# Altium PCB precharge.PcbDoc
Units mil, origin at the board's own origin, x right, y up, seen from the top; angles counter-clockwise.
Board outline 7045 x 3615 mil, 4 copper layers (Top Layer, Internal Plane 1, Internal Plane 2, Bottom Layer); 58 components, 34 nets, 159 pads, 5 vias.
Unrouted connection lines stored in the file: 12.
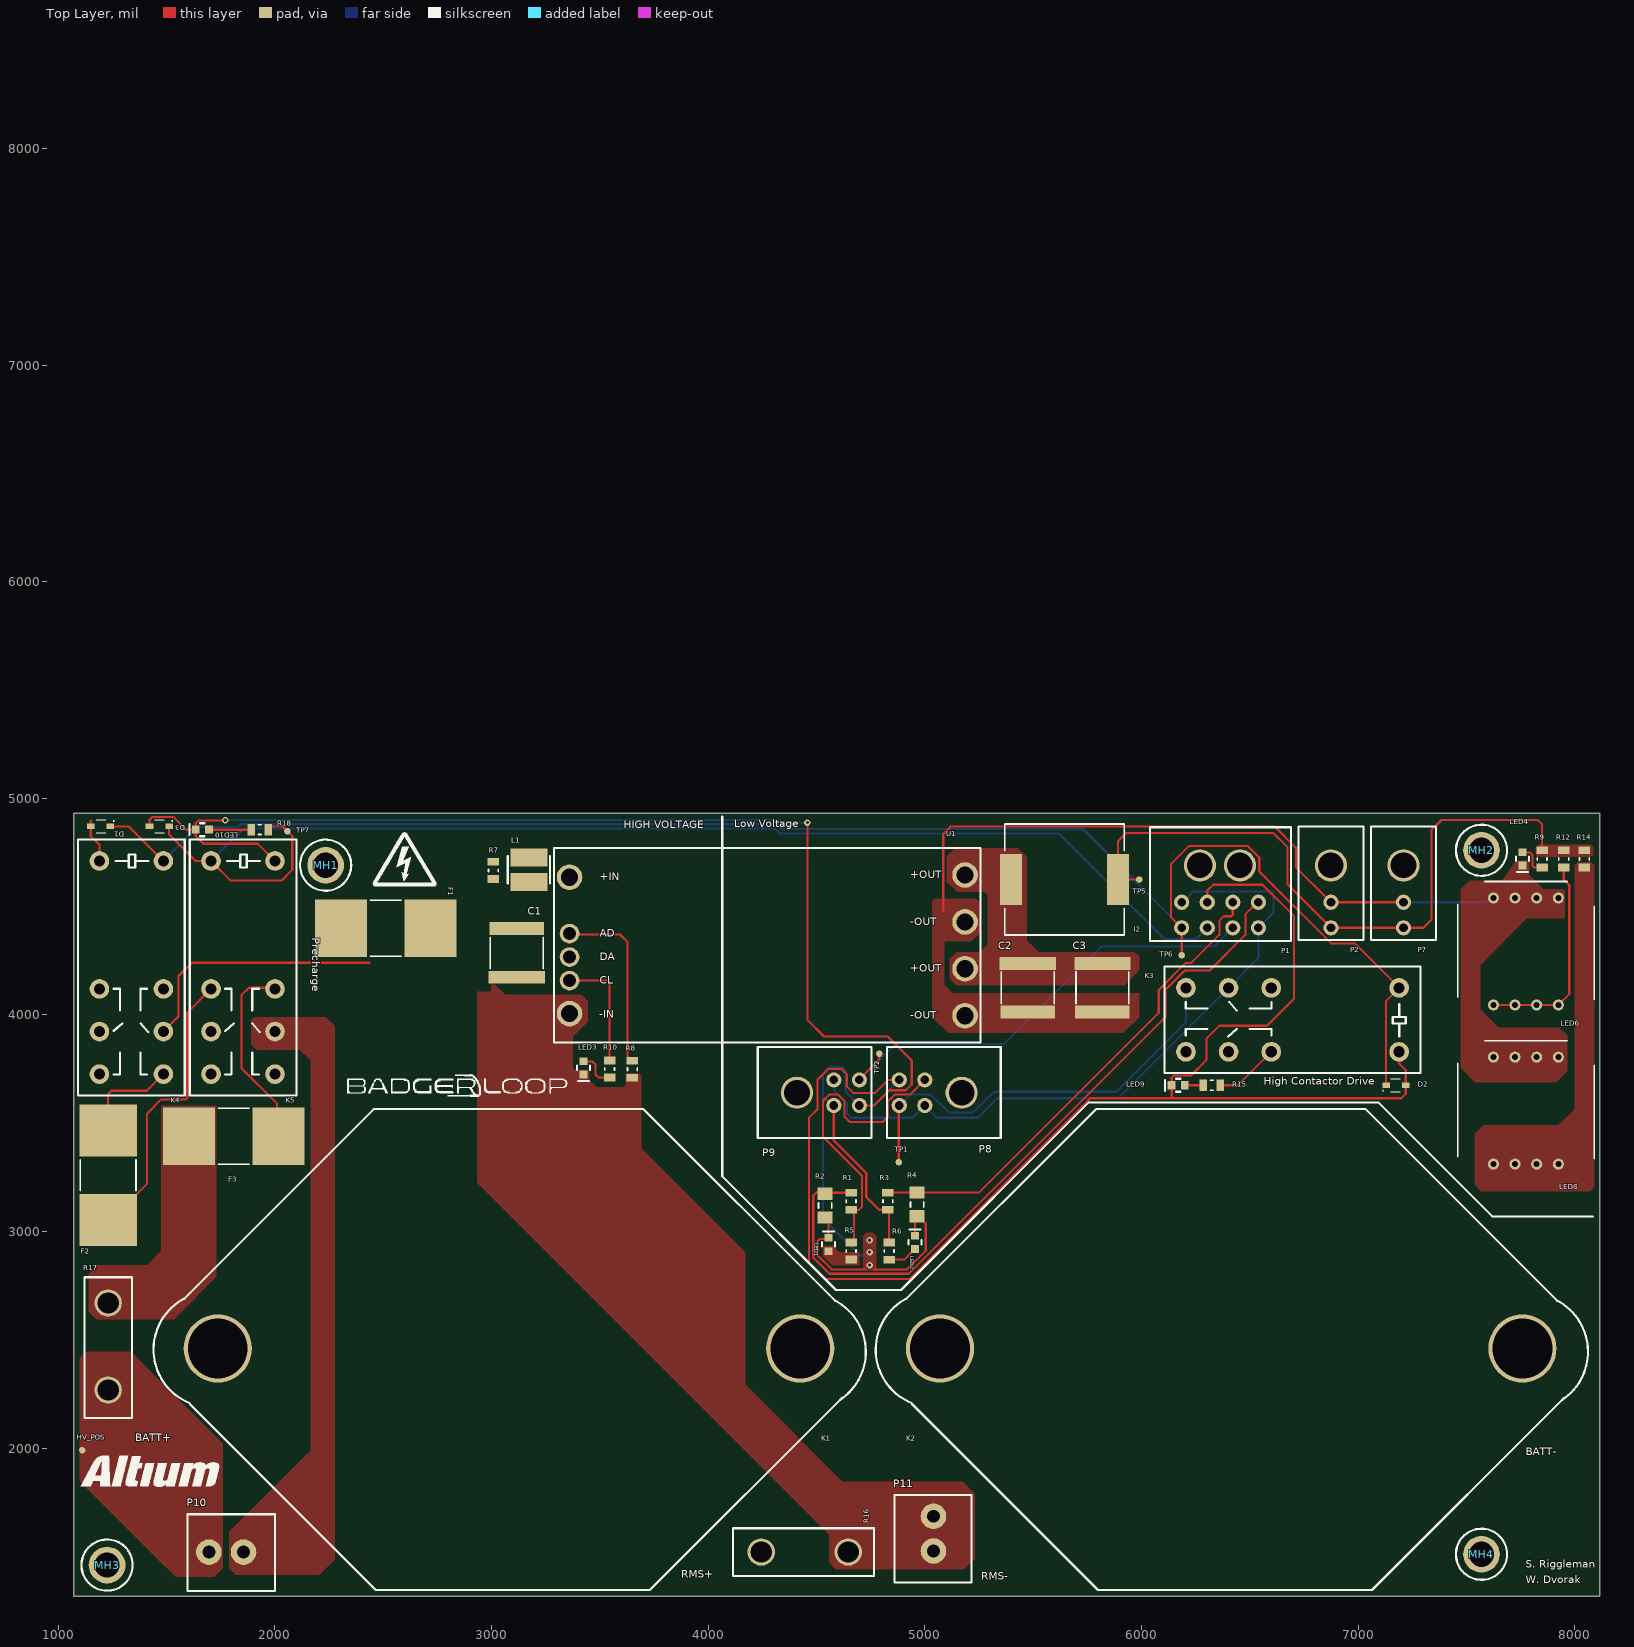
[diagram p0: Top Layer view]
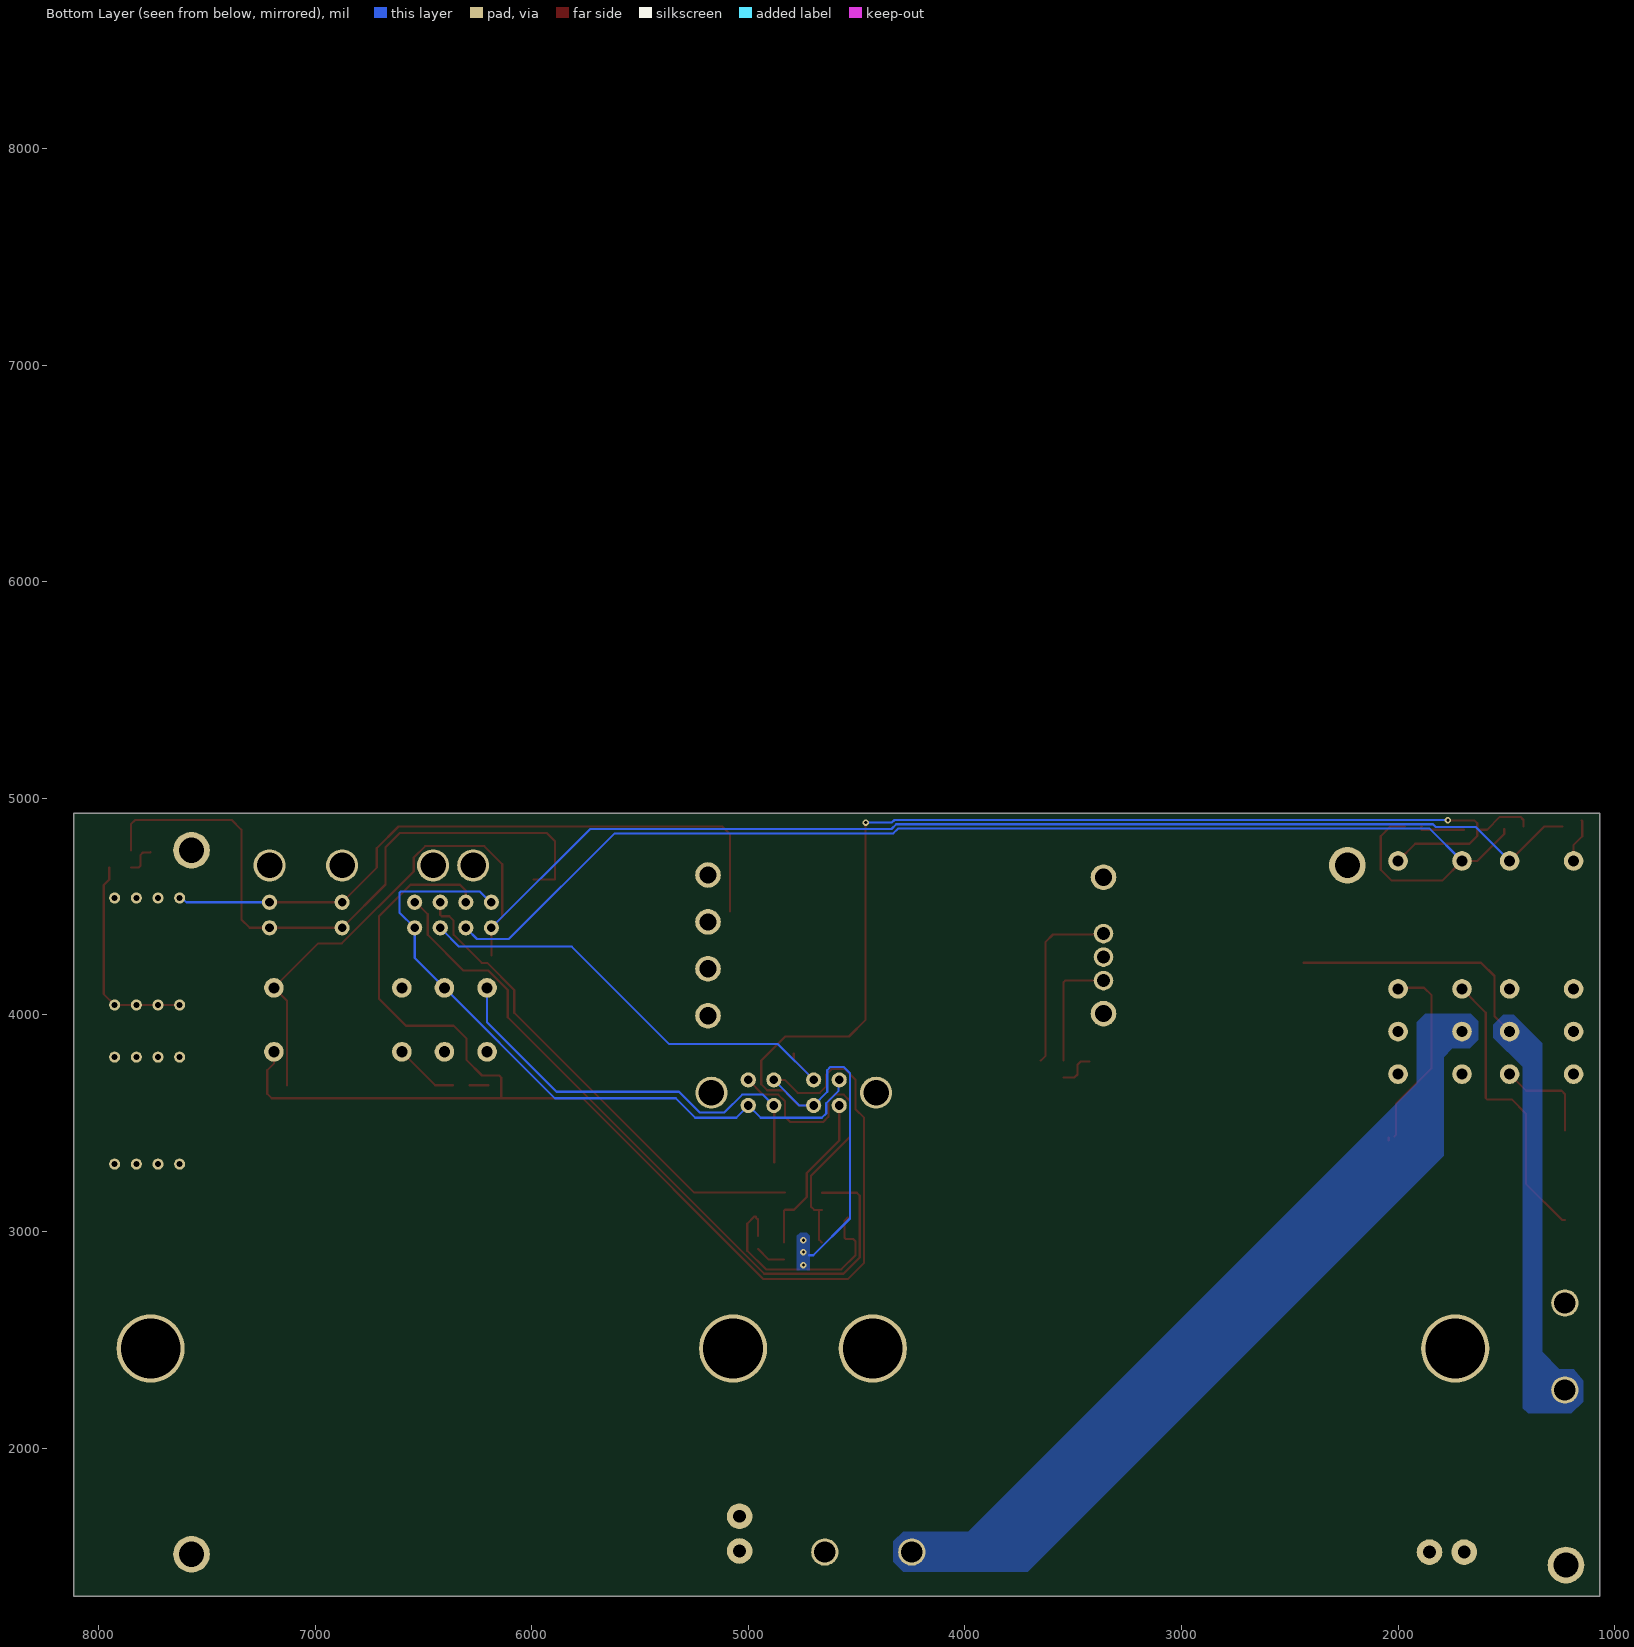
[diagram p1: Bottom Layer view, seen from below]
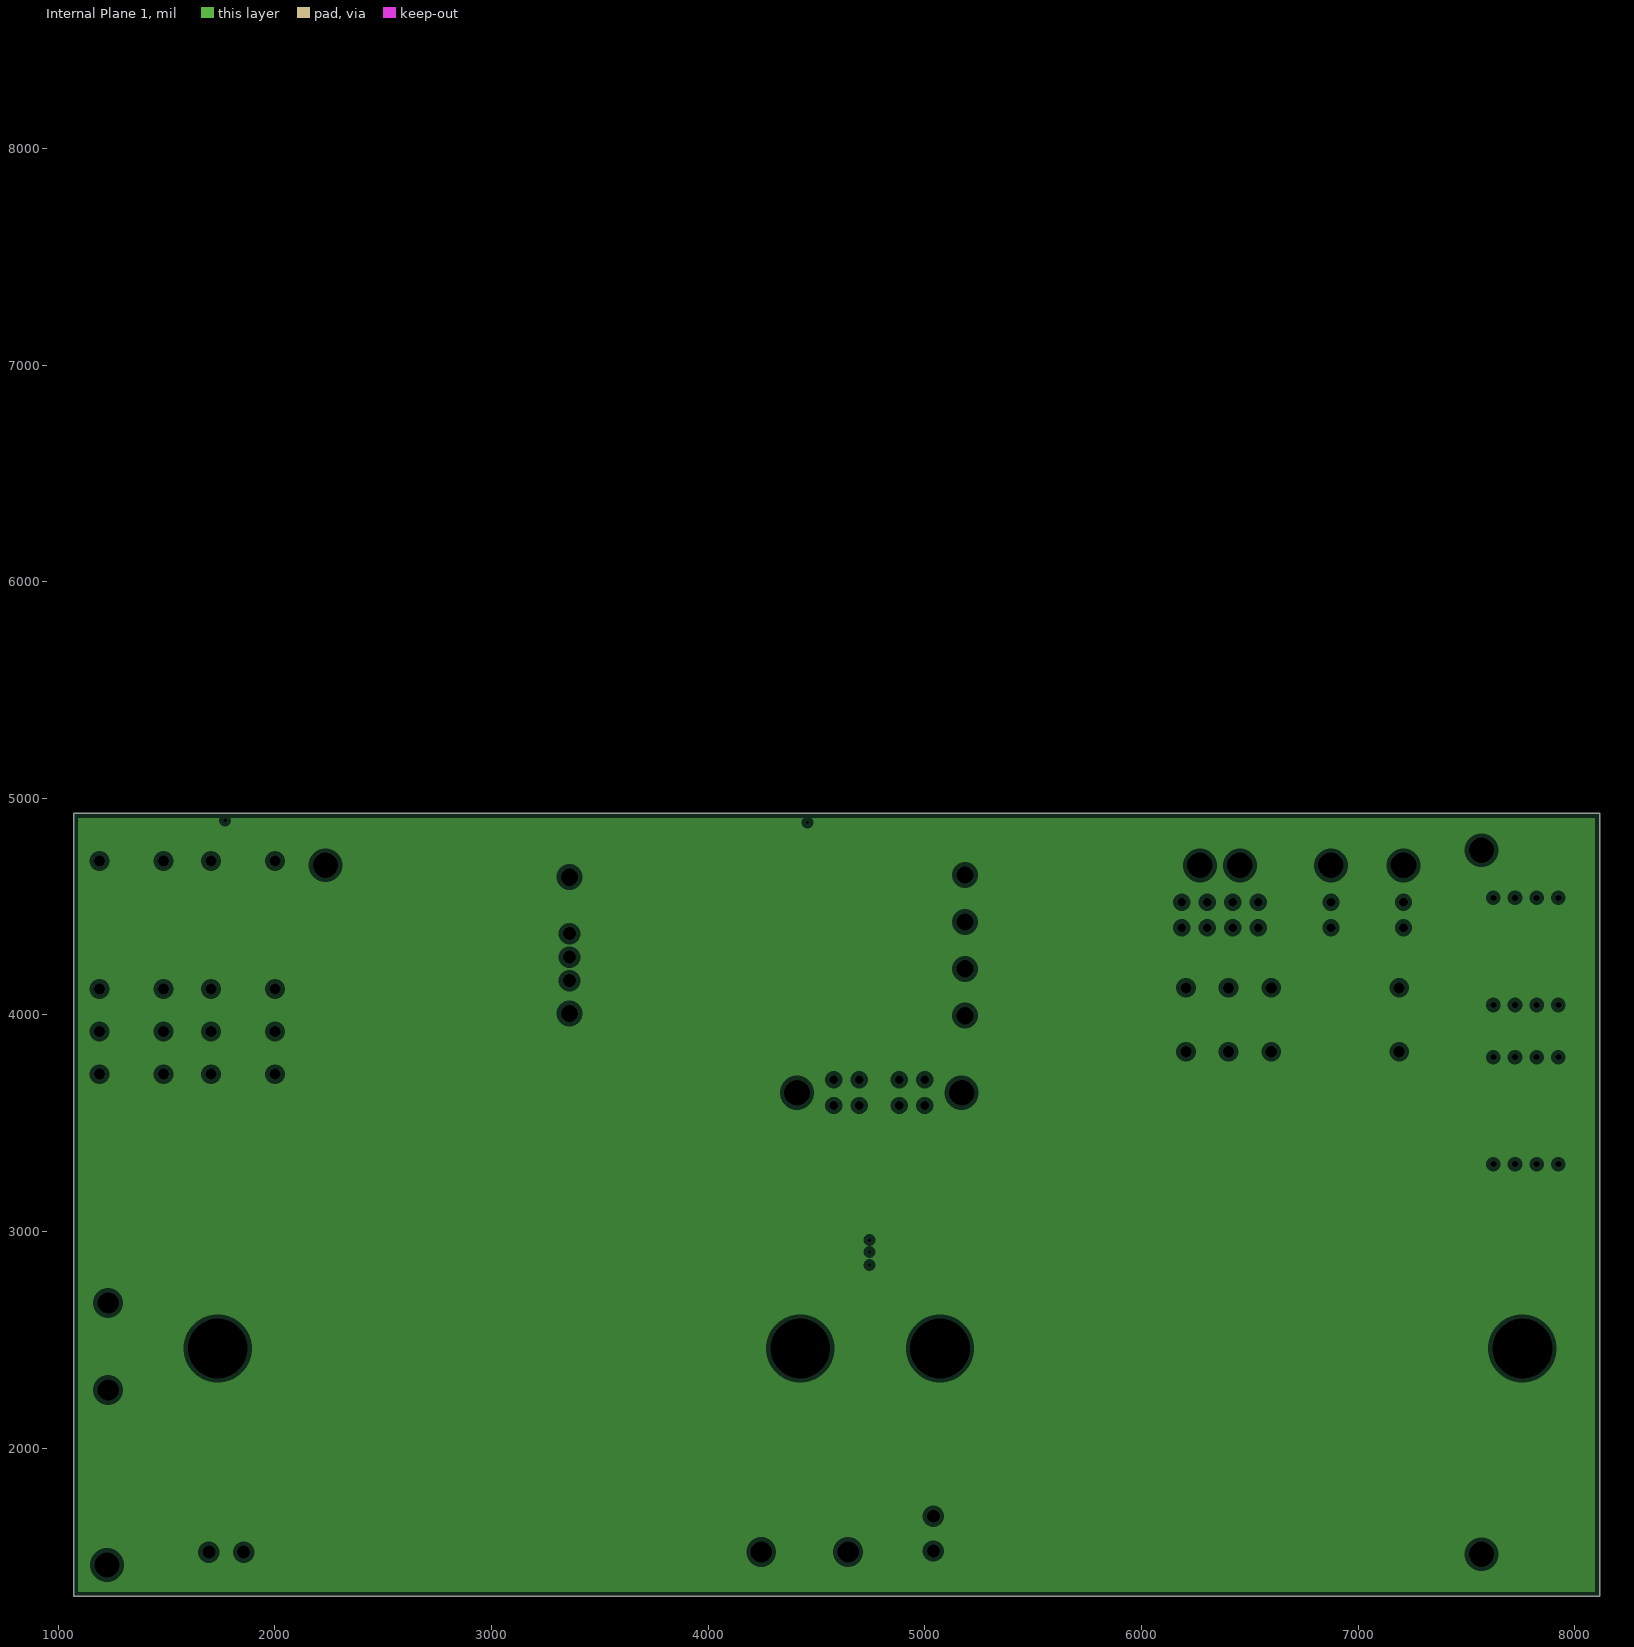
[diagram p2: Internal Plane 1, clearances drawn from the general rule]
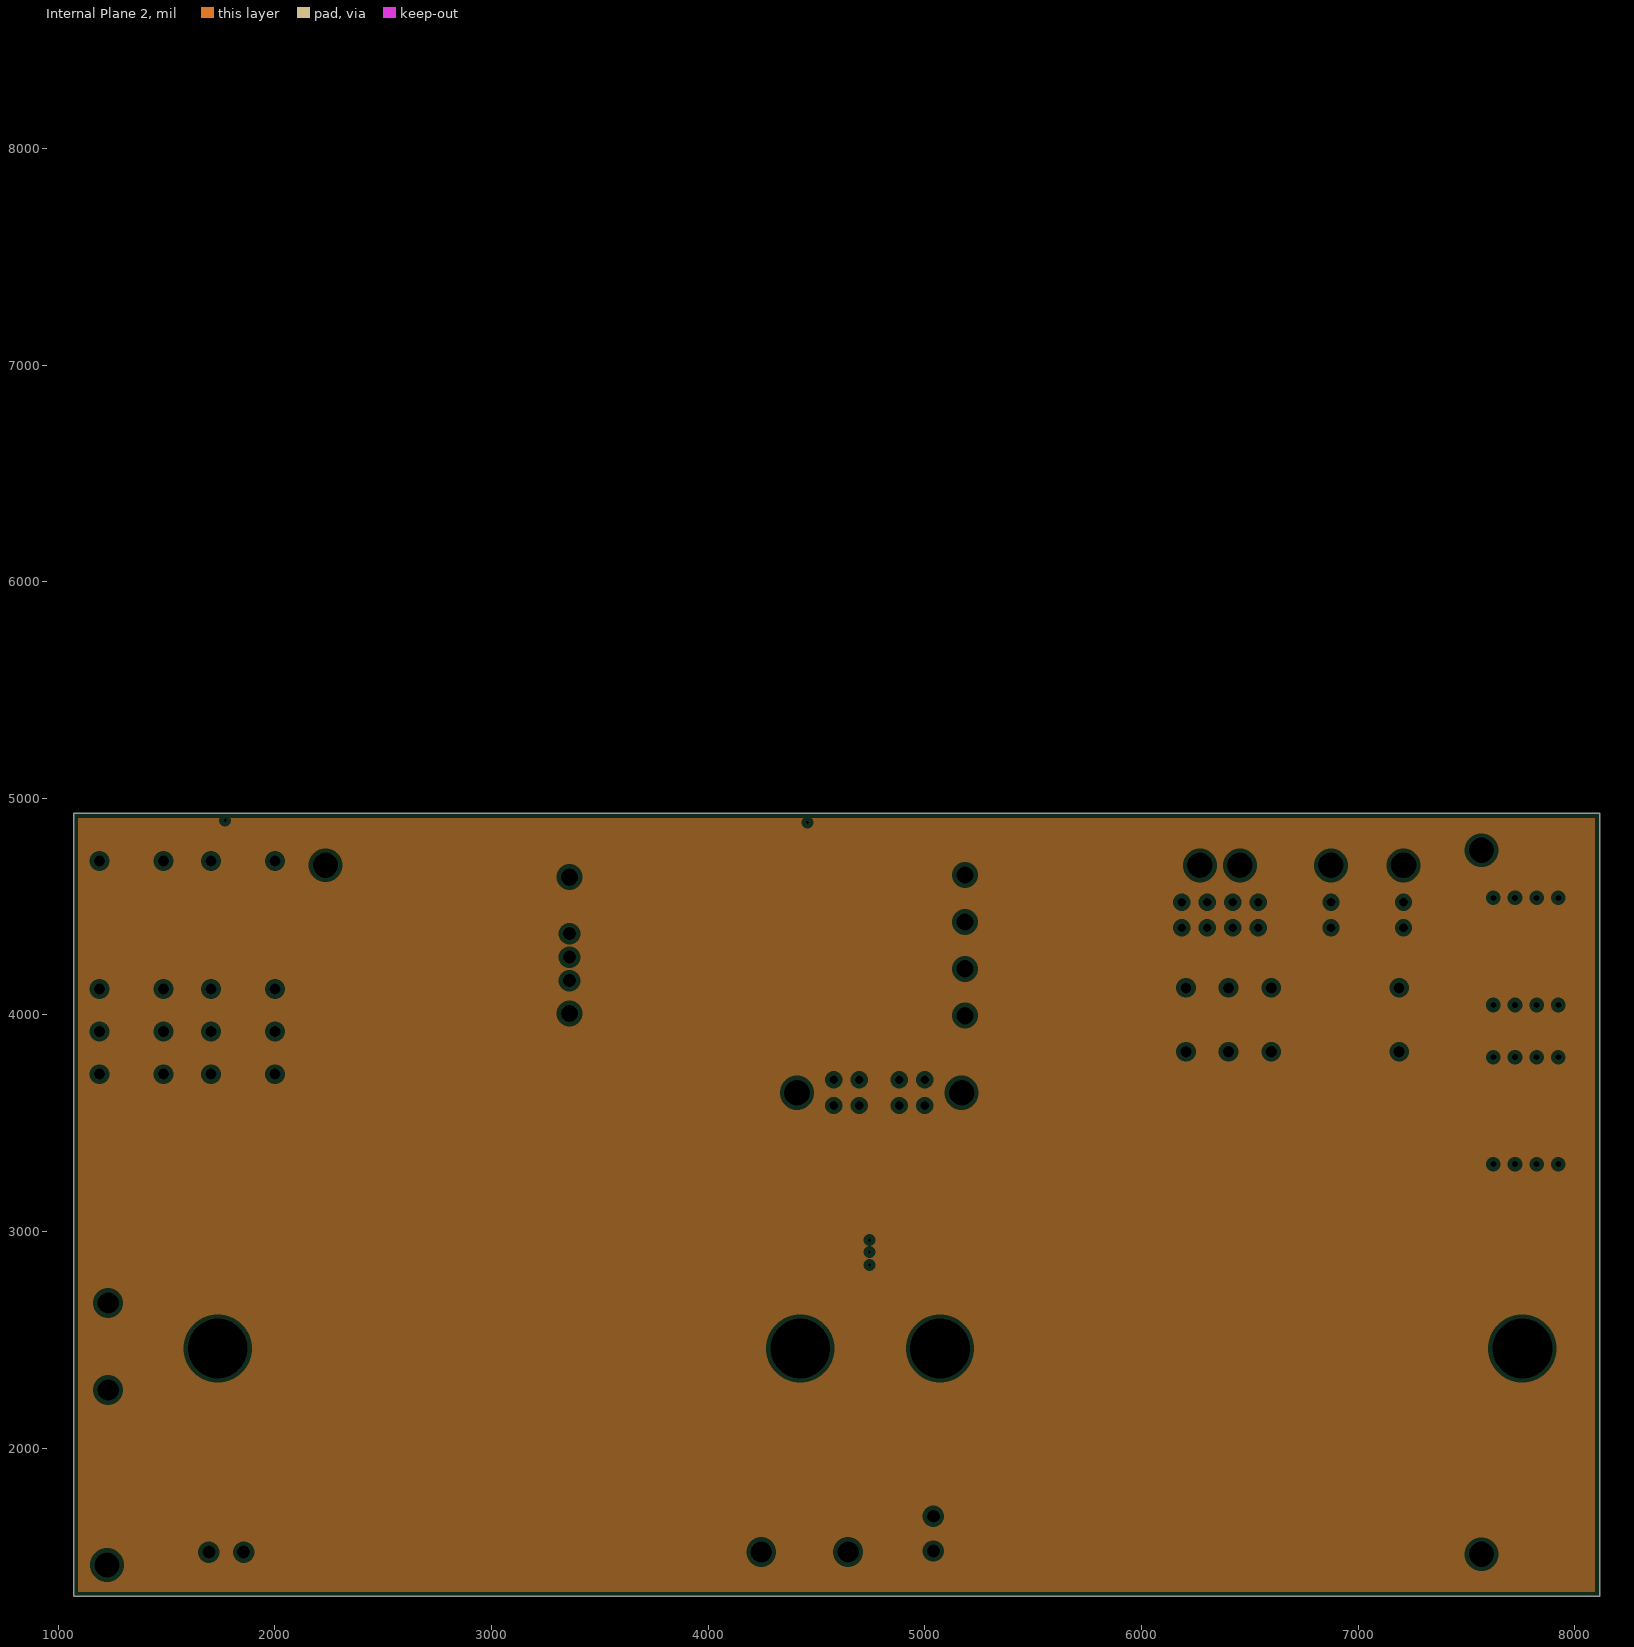
[diagram p3: Internal Plane 2, clearances drawn from the general rule]
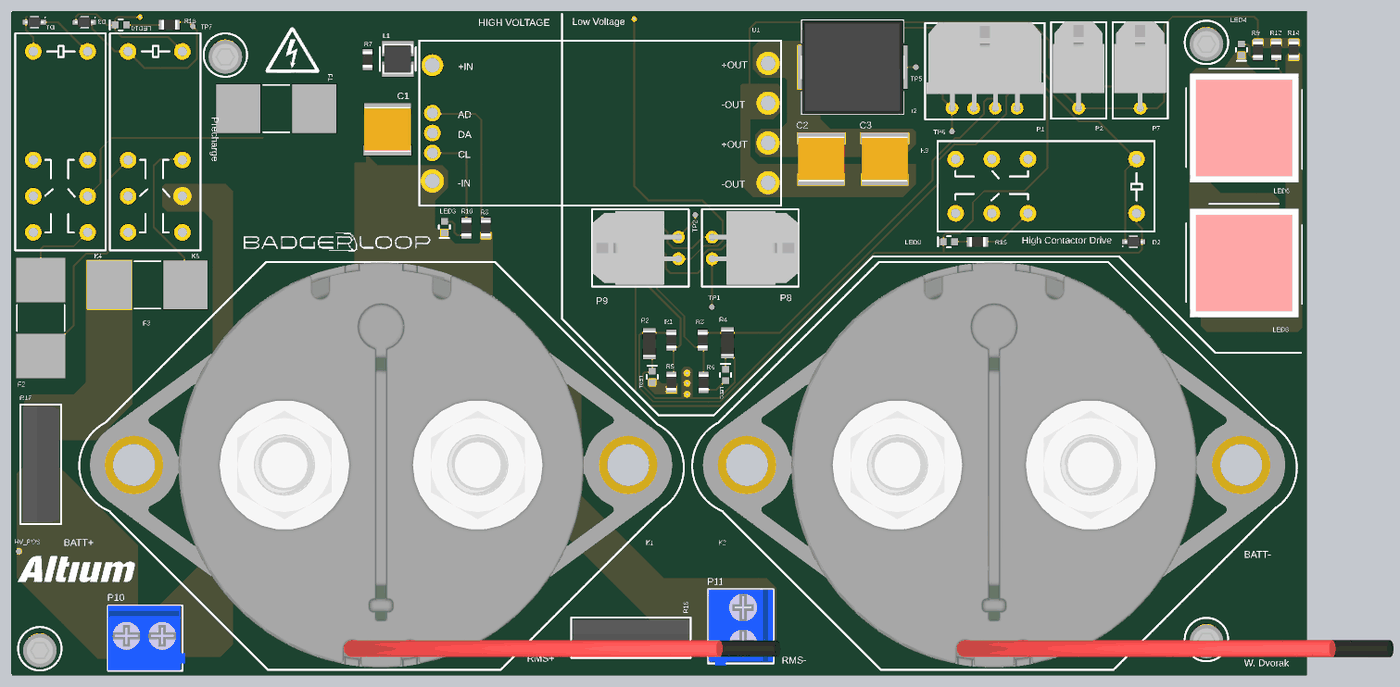
[diagram p4: 3D render of the assembled board from above, using the file's embedded part models]

## Layer stack, top to bottom
Top Solder: solder mask 0.4, Solder Resist, Dk 3.5
Top Layer: signal copper 1.4
Dielectric 1: dielectric 12.6, FR-4, Dk 4.8
Internal Plane 1: plane copper 1.4
Dielectric2: dielectric 12.6, FR-4, Dk 4.8
Internal Plane 2: plane copper 1.4
Dielectric3: dielectric 12.6, FR-4, Dk 4.8
Bottom Layer: signal copper 1.4
Bottom Solder: solder mask 0.4, Solder Resist, Dk 3.5

## Board outline
1070,1315 1070,4930 8115,4930 8115,1315

## Design rules (kind name [scope] priority, off if disabled: settings)
Clearance HV_GND [InNetClass('High Voltage +') vs InNetClass('Ground')] p1: gap=160 ignorepadtopadclearanceinfootprint=TRUE except(0: Arc-Hole Track-Hole SMDPad-Hole THPad-Hole Via-Hole Fill-Hole Poly-Hole Region-Hole Text-Hole; 10: Arc-Text Track-Text SMDPad-Text THPad-Text Via-Text Fill-Text Poly-Text Region-Text Text-Text)
Clearance HV_LV [InNetClass('High Voltage') vs InNetClass('Low Voltage')] p2: gap=160 ignorepadtopadclearanceinfootprint=TRUE except(0: Arc-Hole Track-Hole SMDPad-Hole THPad-Hole Via-Hole Fill-Hole Poly-Hole Region-Hole Text-Hole; 10: Arc-Text Track-Text SMDPad-Text THPad-Text Via-Text Fill-Text Poly-Text Region-Text Text-Text)
Clearance [All] p3: gap=10 ignorepadtopadclearanceinfootprint=TRUE except(0: Arc-Hole Track-Hole SMDPad-Hole THPad-Hole Via-Hole Fill-Hole Poly-Hole Region-Hole Text-Hole)
Clearance Clearance_1 [All] p4: gap=10 ignorepadtopadclearanceinfootprint=TRUE except(0: Arc-Hole Track-Hole SMDPad-Hole THPad-Hole Via-Hole Fill-Hole Poly-Hole Region-Hole Text-Hole)
Height [All] p1: minheight=0 maxheight=20000 prefheight=500
HoleSize [All] p1: absolutevalues=TRUE maxlimit=300 minlimit=1 maxpercent=80.000 minpercent=20.000
PlaneClearance [All] p1: clearance=20
PlaneConnect [All] p1: planeconnectstyle=Relief reliefexpansion=20 reliefentries=4 reliefconductorwidth=10 reliefairgap=10
PolygonConnect [All] p1: connectstyle=Direct reliefconductorwidth=10 reliefentries=4 polygonreliefangle="90 Angle" airgapwidth=10
RoutingVias [All] p1: holewidth=15 width=30 viastyle="Through Hole" minholewidth=5 minwidth=12 maxholewidth=500 maxwidth=750
SilkToSilkClearance [All] p1: silktosilkclearance=1
SilkToSolderMaskClearance [IsPad] p1: minsilkscreentomaskgap=1 clearancetoexposedcopper=TRUE
SolderMaskExpansion [All] p1: expansion=4
Width [All] p1: maxlimit=10 minlimit=10 preferedwidth=10
24 further rules are at their usual default settings.

## Classes and differential pairs
net class Ground: Avionics_RET HV_GND HV_IND_GND
net class "High Voltage +": HV_BATT_POS_IN HV_BATT_POS_OUT NetC1_2 NetF1_2 NetF2_1 NetF2_2 NetF3_1 NetF3_2 NetK5_3
polygon class HV_POS_IN: "Top Layer-No Net" "Top Layer-No Net 3"
net class "Low Voltage": Avionics_RET High_Contactor_Aux High_Contactor_DR HV_IND_GND HV_IND_POS Low_Contactor_Aux Low_Contactor_DR NetC2_1 NetK3_7 NetLED1_1 NetLED2_1 NetLED4_1 NetLED6_1 NetLED8_1 NetLED9_1 NetLED10_1 NetP8_1 NetP9_1 RMS_7_Relay2 RMS_21_Relay1 VPOS-24V
net class "High Voltage": HV_BATT_POS_IN HV_BATT_POS_OUT HV_GND NetC1_2 NetF1_2 NetF2_1 NetF2_2 NetF3_1 NetF3_2 NetK5_3 NetLED3_1 NetR8_2 NetR10_2
component class precharge_relays: D1 D2 D3 F2 F3 K3 K4 K5 LED9 LED10 R15 R16 R17 R18 TP6 TP7
component class indicator_light: C1 C2 C3 F1 HV_POS I2 L1 LED3 LED4 LED6 LED8 R7 R8 R9 R10 R12 R14 TP4 TP5 U1
component class Contactors: H1 H2 H3 H4 K1 K2 LED1 LED2 P8 P9 P10 P11 R1 R2 R3 R4 R5 R6 TP1 TP2
component class connectors: MH1 MH2 MH3 MH4 P1 P2 P7

## Components (designator, comment, footprint, x,y, rotation, side; value= is the part's Value field where it differs from the comment)
C1 "CGA9P4X7T2W105K250KE_1" CAPC5860X28N 3116,4286 r90 top
C2 "CGA9P4X7T2W105K250KE_1" CAPC5860X28N 5475,4125 r270 top
C3 "CGA9P4X7T2W105K250KE_1" CAPC5860X28N 5820,4125 r270 top
D1 "Diode General Purpose_2" SODFL250X110-2N 1195,4870 r0 top
D2 "Diode General Purpose_2" SODFL250X110-2N 7175,3675 r180 top
D3 "Diode General Purpose_2" SODFL250X110-2N 1466,4870 r0 top
F1 "F6257CT-ND" "FUSE BOARD MNT 500MA 350VAC/VDC" 2511,4400 r0 top
F2 "F6257CT-ND" "FUSE BOARD MNT 500MA 350VAC/VDC" 1230,3260 r90 top
F3 "F6257CT-ND" "FUSE BOARD MNT 500MA 350VAC/VDC" 1810,3440 r180 top
HV_POS "TP" "Test Point" 1110,1990 r90 top
I2 "744309033" INDM140130X90N 5645,4625 r0 top
K1 "Gigavac 200" "Gigavac 200" 1736.02,2460 r0 top
K2 "*" "Gigavac 200" 5070,2460 r0 top
K3 "G2RL-24_DC12" G2RL 7190,4125 r0 top
K4 "G2RL-24_DC12" G2RL 1189.72,4710.55 r90 top
K5 "G2RL-24_DC12" G2RL 1705,4710.55 r90 top
L1 "SRR3818A-1R0Y" INDM3838X18N 3172,4670 r270 top (schematic designator I1)
LED1 "LED GREEN 0603" "LED 0603 GREEN" 4555,2940 r90 top
LED2 "LED GREEN 0603" "LED 0603 GREEN" 4955,2950 r90 top
LED3 "LED RED 0603" "LED 0603 RED" 3425,3755 r270 top
LED4 "LED GREEN 0603" "LED 0603 GREEN" 7760,4720 r270 top
LED6 "DE4SRD" DE4SRD 7925,4045.91 r90 top
LED8 "DE4SRD" DE4SRD 7925,3310.91 r90 top
LED9 "LED GREEN 0603" "LED 0603 GREEN" 6169.49,3675 r180 top
LED10 "LED GREEN 0603" "LED 0603 GREEN" 1665,4855 r180 top
MH1 "4-40 Mount Hole" MH 2234,4691 r0 top
MH2 "4-40 Mount Hole" MH 7570,4760 r0 top
MH3 "4-40 Mount Hole" MH 1225,1460 r0 top
MH4 "4-40 Mount Hole" MH 7570,1510 r0 top
P1 "43045-0800" 430450800 6270,4690 r180 top
P2 "43045-0200" 430450200 6875,4690 r180 top
P7 "43045-0200" 430450200 7210,4690 r180 top
P8 "43045-0400" 430450400 5170,3641 r90 top
P9 "43045-0400" 430450400 4410,3641 r270 top
P10 "Screw Terminal 2x1" "2POS TERM BLOCK" 1695,1520 r0 top
P11 "Screw Terminal 2x1" "2POS TERM BLOCK" 5040,1685 r270 top
R1 "10k" SMD-0805-RES 4660,3139.37 r270 top
R2 "2.61k" SMD-1206-RES 4540,3120 r270 top
R3 "10k" SMD-0805-RES 4830,3140 r270 top
R4 "2.61k" SMD-1206-RES 4965,3125 r270 top
R5 "1k" SMD-0805-RES 4660,2910 r270 top
R6 "1k" SMD-0805-RES 4835,2909.49 r270 top
R7 "1" SMD-0805-RES 3008,4667 r270 top
R8 "1k" SMD-0805-RES 3650,3749.37 r90 top
R9 "1k" SMD-0805-RES 7850,4720 r270 top
R10 "1k" SMD-0805-RES 3545,3750 r90 top
R12 "1k" SMD-0805-RES 7950,4720 r270 top
R14 "1k" SMD-0805-RES 8045,4720 r270 top
R15 "1k" SMD-0805-RES 6325,3675 r180 top
R16 "LTO150F10000JTE3" TO-247-2 4245,1520 r0 top
R17 "LTO150F10000JTE3" TO-247-2 1230,2268.43 r90 top
R18 "1k" SMD-0805-RES 1930,4855 r180 top
TP1 "TP" "Test Point" 4880,3320 r90 top
TP2 "TP" "Test Point" 4790,3821 r90 top
TP5 "TP" "Test Point" 5990,4625 r90 top
TP6 "TP" "Test Point" 6186,4275 r90 top
TP7 "TP" "Test Point" 2057.5,4847.5 r90 top
U1 "DCM290P138T600A40" DCM290y138x600A40 4272.99,4320.96 r0 top

## Footprints (in the part's own frame and the unit in brackets; to place one, negate y for a bottom-side part, rotate by r counter-clockwise, add the part's x,y. Pads: shape width x height; smd on the part's side, far side on the other; paste and mask are expansions set on the pad)
"2POS TERM BLOCK" [mm] "5mm Pitch"
  round 3 hole 1.5: 1(0,0) 2(4.064,0)
  silkscreen extent -2.5,-4.57 7.75,4.44, body extent -2.51,-4.57 8.09,4.43, height 12.6
430450200 [mil]
  round 70 hole 40: 1(0,170) 2(0,288)
  round 148 hole 118: 3(0,0)
  silkscreen extent -150,-180 150,345, body extent -141,-185 141,297, height 340
430450400 [mil]
  round 70 hole 40: 1(59,170) 2(-59,170) 3(59,288) 4(-59,288)
  round 148 hole 118: 5(0,0)
  silkscreen extent -210,-181 210,344, body extent -200,-180 200,302, height 340
430450800 [mil]
  round 70 hole 40: 1(84,170) 2(-34,170) 3(-152,170) 4(-270,170) 5(84,288) 6(-34,288) 7(-152,288) 8(-270,288)
  round 148 hole 118: 9(-185,0) 9(0,0)
  silkscreen extent -420,-176 230,349, body extent -413,-180 223,302, height 340
CAPC5860X28N [mm] "Chip Capacitor, 2-Leads, Body 5.75x6.00mm, IPC Medium Density"
  rect 1.5x6.6 smd: 1(-2.85,0)
  rect 1.5x6.4 smd: 2(2.85,0)
  silkscreen extent -1.85,-3.1 1.85,3.1, body extent -3.1,-3.2 3.1,3.2, height 2.8
DCM290y138x600A40 [mm]
  round 3 hole 2.03: 0(-23.19,8) 4(-23.19,-8) 5(23.19,8.25) 6(23.19,2.75) 7(23.19,-2.75) 8(23.19,-8.25)
  round 2.3 hole 1.52: 1(-23.19,1.38) 2(-23.19,-1.38) 3(-23.19,-4.13)
  silkscreen extent -25,-11.4 25,11.4, body extent -25.02,-11.4 25.02,11.43, height 8.16
DE4SRD [mm]
  round 1.3 hole 0.7: 1(0,7.62) 1(0,5.08) 1(0,2.54) 1(0,0) 2(12.55,0) 2(12.55,2.54) 2(12.55,5.08) 2(12.55,7.62)
  silkscreen extent 0.64,-4.19 14.48,11.81, body extent -1.2,-3.7 13.8,11.3, height 10.6
"FUSE BOARD MNT 500MA 350VAC/VDC" [mm]
  rect 6.1x6.75 smd: 1(-5.25,0) 2(5.25,0)
  silkscreen extent -1.8,-3.27 1.8,3.27, body extent -7.93,-3.36 7.93,3.36, height 4.25
G2RL [mm]
  round 2.3 hole 1.3: 1(0,0) 2(-15,0) 3(-20,0) 4(-25,0) 5(-25,-7.5) 6(-20,-7.5) 7(-15,-7.5) 8(0,-7.5)
  silkscreen extent -27.5,-10 2.5,2.5, body extent -27.43,-9.91 2.41,2.41, height 15.7
"Gigavac 200" [mm]
  round 8 hole 7: ""(0,0) ""(68.3,0)
  silkscreen extent -7.54,-28.32 75.99,28.07, body extent -6.02,-28 89.33,28, height 184.32
INDM3838X18N [mm] "Molded Inductor, 2-Leads, Body 3.80x3.80mm, IPC Medium Density"
  rect 2.1x4.35 smd: 1(-1.425,0) 2(1.425,0)
  silkscreen extent -1.62,-2.48 1.62,2.48, body extent -2.12,-2.12 2.12,2.12, height 1.8
INDM140130X90N [mm] "Molded Inductor, 2-Leads, Body 14.00x13.00mm, IPC Medium Density"
  rect 2.6x6 smd: 1(-6.275,0) 2(6.275,0)
  silkscreen extent -7,-6.5 7,6.5, body extent -7.22,-6.5 7.22,6.5, height 9
"LED 0603 GREEN" [mm] "Chip Diode, 2-Leads, Body 1.60x0.80mm, IPC Medium Density"
  rect 0.9x0.95 smd: 1(-0.775,0) 2(0.775,0)
  silkscreen extent -0.25,-0.76 1.52,0.76, body extent -0.8,-0.4 0.8,0.4, height 0.8
"LED 0603 RED" [mm] "Chip Diode, 2-Leads, Body 1.60x0.80mm, IPC Medium Density"
  rect 0.9x0.95 smd: 1(-0.775,0) 2(0.775,0)
  silkscreen extent -0.25,-0.76 1.52,0.76, body extent -0.8,-0.4 0.8,0.4, height 0.8
MH [mm] "#10 Mount Hole"
  round 4.3 hole 2.946 unplated: 2(0,0)
  silkscreen extent -3,-3 3,3, body extent -2.32,-2.58 2.32,2.07, height 2.84
SMD-0805-RES [mm]
  rect 0.9x1.35 smd: 1(-1,0) 2(1,0)
  silkscreen extent -0.15,-0.58 0.15,0.58, body extent -1.1,-0.67 1.1,0.67, height 0.5
SMD-1206-RES [mm]
  rect 1.45x1.75 smd: 1(-1.4,0) 2(1.4,0)
  silkscreen extent -0.3,-0.77 0.3,0.77, body extent -1.78,-0.87 1.78,0.87, height 0.5
SODFL250X110-2N [mm] "SODFL, 2-Leads, Body 1.30x2.50mm, IPC Medium Density"
  rect 0.9x0.65 smd: 1(-1.15,0) 2(1.15,0)
  silkscreen extent -0.51,-0.76 1.57,0.76, body extent -1.25,-0.7 1.25,0.7, height 1.1
"Test Point" [mil] "SMD Test Point"
  round 30 smd: 1(0,0)
TO-247-2 [mm]
  round 3.2 hole 2.5: 1(0,0) 2(10.2,0)
  silkscreen extent -3.3,-2.79 13.21,2.79, body extent -3.02,-2.54 12.93,2.49, height 26

## Part data
C1 C2 C3: "CAP CER 1UF 450V X7T 2220", Capacitance=1uF, Case/Package=2220, Case Code (Metric)=5750, Dielectric=X7T, Manufacturer=TDK, Manufacturer Part Number=CGA9P4X7T2W105K250KE, Max Operating Temperature=125°C, Min Operating Temperature=-55°C, Package Quantity=1, Ratings=AEC-Q200, Supplier Part Number 1=445-8765-6-ND, Tolerance=10%, Voltage Rating=450V, Case Code (Imperial)=2220, ComponentLink1Description=http://www.mouser.com/ds/2/400/lcc_commercial_soft_en-775842.pdf?src-supplier=Mouser, ComponentLink1URL=http://www.mouser.com/ds/2/400/lcc_commercial_soft_en-775842.pdf?src-supplier=Mouser, ComponentLink2Description=http://www.farnell.com/datasheets/1839935.pdf?src-supplier=Element14, ComponentLink2URL=http://www.farnell.com/datasheets/1839935.pdf?src-supplier=Element14, Depth=5mm, Features="Soft Termination", Height=2.5mm, Length=5.7mm, Mount="Surface Mount", Packaging="Tape and Reel", Pricing 1="1=3.67, 10=2.957, 100=2.3064 (USD)", REACH SVHC="No SVHC", Stock 1=10698, Supplier 1=Digi-Key, Termination=SMD/SMT, Thickness=0.11inch, Voltage Rating (DC)=450V, Weight=0.016932oz, Width=0.197inch
D1 D2 D3: "DIODE GEN PURP 20V 350MA SOD323", Manufacturer="Diodes Incorporated", Manufacturer P/N=SD103CWS-7-F, Package / Case=SOD323, ComponentLink1Description=Digikey, ComponentLink1URL=https://www.digikey.com/product-detail/en/diodes-incorporated/SD103CWS-7-F/SD103CWS-FDIDKR-ND/1836772, ComponentLink2Description=Datasheet, ComponentLink2URL=https://www.diodes.com/assets/Datasheets/ds30101.pdf, ComponentLink3Description=Dimensions, ComponentLink3URL=https://www.diodes.com/assets/Package-Files/SOD323.pdf, Digikey P/N=SD103CWS-FDIDKR-ND
F1 F2 F3: "FUSE BOARD MNT 500MA 350VAC/VDC", Manufacturer=Littelfuse, Manufacturer P/N=46205000000, Digikey Link=https://www.digikey.com/product-detail/en/littelfuse-inc/46205000000/F6257CT-ND/4331764, Digikey P/N=F6257CT-ND
HV_POS TP1 TP2 TP5 TP6 TP7: "SMD TEST POINT"
I2: "FIXED IND 330NH 47.5A 0.165 MOHM", Manufacturer=Wurth, Digikey Link=https://www.digikey.com/product-detail/en/wurth-electronics-inc/744309033/732-3006-1-ND/2626130, Digikey P/N=732-3006-1-ND, Manufacturer P/N=744309033
K2: library part "Gigavac 200", ComponentLink1Description=http://www.gigavac.com/sites/default/files/catalog/spec_sheet/gv200.pdf, ComponentLink1URL=http://www.gigavac.com/sites/default/files/catalog/spec_sheet/gv200.pdf
K3 K4 K5: "RELAY GEN PURPOSE DPDT 8A 12V", Manufacturer="Omron Electronics", Manufacturer P/N="G2RL-24 DC12", Digikey Link=https://www.digikey.com/product-detail/en/omron-electronics-inc-emc-div/G2RL-24-DC12/Z147-ND/307667, Digikey P/N=Z147-ND
L1: "FIXED IND 1UH 3.6A 37 MOHM SMD", Manufacturer="Bourns Inc.", Digikey Link=https://www.digikey.com/product-detail/en/bourns-inc/SRR3818A-1R0Y/SRR3818A-1R0YCT-ND/7556036, Digikey P/N=SRR3818A-1R0YCT-ND, Manufacturer P/N=SRR3818A-1R0Y
LED1 LED2 LED4 LED9 LED10: Color=GREEN, Manufacturer="Lite-On Inc.", Manufacturer P/N=LTST-C190KGKT, Package / Case=0603, Digikey P/N=160-1435-1-ND
LED3: "Red 631nm LED Indication - Discrete 2V 0603 (1608 Metric)", Color=RED, Manufacturer="Lite-On Inc.", Manufacturer P/N=LTST-C190KRKT, Package / Case=0603, Digikey P/N=160-1436-1-ND
LED6 LED8: "LED Bars and Arrays Red 640nm 300mcd Diffused Light Bar", Color=Red, Current=30mA, Forward Current=20mA, Forward Voltage=1.85V, Manufacturer=Kingbright, Package Quantity=33, Power Rating=75mW, Supplier Part Number 1=754-1672-5-ND, ComponentLink1Description=http://www.mouser.com/ds/2/216/DE4SRD-69987.pdf?src-supplier=Mouser, ComponentLink1URL=http://www.mouser.com/ds/2/216/DE4SRD-69987.pdf?src-supplier=Mouser, ComponentLink2Description=http://www.kingbrightusa.com/images/catalog/SPEC/DE4SRD.pdf?src-supplier=Digi-Key, ComponentLink2URL=http://www.kingbrightusa.com/images/catalog/SPEC/DE4SRD.pdf?src-supplier=Digi-Key, Element Configuration=Single, Illumination Color=Red, Lead Free="Lead Free", Lens Style=Diffused,Tinted, Luminous Intensity=340mcd, Manufacturer Part Number=DE4SRD, Mount="Through Hole", Packaging=Rail/Tube, Pricing 1="1=2.5, 10=2.217, 100=1.287, 500=1.144, 1000=0.98313, 2500=0.9295 (USD)", Stock 1=3382, Supplier 1=Digi-Key, Voltage Rating=1.85V
P1: "CONN HEADER R/A 8POS 3MM", Case/Package=SMC, Color=Black, Contact Resistance=10mR, Current Rating=5A, Flammability Rating="UL94 V-0", Insulation Resistance=1GR, Manufacturer=Molex, Max Operating Temperature=105°C, Max Voltage Rating (DC)=250.25kV, Min Operating Temperature=-40°C, Package Quantity=1440, Supplier Part Number 1=WM1816-ND, Voltage Rating=600V, Voltage Rating (AC)=250V, Approvals=UL,CSA,TUV, ComponentLink1Description=https://datasheet.ciiva.com/5158/0430450800-pcb-headers-142625-5158817.pdf?src-supplier=Mouser, ComponentLink1URL=https://datasheet.ciiva.com/5158/0430450800-pcb-headers-142625-5158817.pdf?src-supplier=Mouser, ComponentLink2Description=https://datasheet.ciiva.com/7683/27645-7683683.pdf?src-supplier=Element14, ComponentLink2URL=https://datasheet.ciiva.com/7683/27645-7683683.pdf?src-supplier=Element14, ComponentLink3Description=https://datasheet.ciiva.com/19462/883536-19462164.pdf?src-supplier=Jameco, ComponentLink3URL=https://datasheet.ciiva.com/19462/883536-19462164.pdf?src-supplier=Jameco, ComponentLink4Description=https://datasheet.ciiva.com/11751/0900766b80027348-11751142.pdf?src-supplier=RSComponents, ComponentLink4URL=https://datasheet.ciiva.com/11751/0900766b80027348-11751142.pdf?src-supplier=RSComponents, ComponentLink5Description=https://datasheet.ciiva.com/30198/267770430450800-pcb-headers-30198875.pdf?src-supplier=Onlinecomponents.com, ComponentLink5URL=https://datasheet.ciiva.com/30198/267770430450800-pcb-headers-30198875.pdf?src-supplier=Onlinecomponents.com, ComponentLink6Description=https://datasheet.ciiva.com/1443/1850016-1443537.pdf?src-supplier=Element14, ComponentLink6URL=https://datasheet.ciiva.com/1443/1850016-1443537.pdf?src-supplier=Element14, ComponentLink7Description=https://datasheet.ciiva.com/14155/04402310-14155206.pdf?src-supplier=Distrelec, ComponentLink7URL=https://datasheet.ciiva.com/14155/04402310-14155206.pdf?src-supplier=Distrelec, ComponentLink8Description=https://datasheet.ciiva.com/16657/0430450800-pcb-headers-16657964.pdf?src-supplier=Avnet+Europe, ComponentLink8URL=https://datasheet.ciiva.com/16657/0430450800-pcb-headers-16657964.pdf?src-supplier=Avnet+Europe, ComponentLink9Description=https://datasheet.ciiva.com/10087/0430450800-pcb-headers-10087853.pdf?src-supplier=Avnet, ComponentLink9URL=https://datasheet.ciiva.com/10087/0430450800-pcb-headers-10087853.pdf?src-supplier=Avnet, Contact Material=Brass,Tin, Contact Plating=Tin, Depth=12.2mm, Diameter=3mm, Gender=Male, Glow Wire Compliant=Compliant, Halogen Free="Low Halogen", Height=8.77mm, Housing Color=Black, Housing Material=Thermoplastic, Lead Free="Lead Free", Length=16.15mm, Manufacturer Part Number=43045-0800, Material=Polyester, Max Current Rating=5A, Mount="Through Hole", Number of Circuits=8, Number of Contacts=8, Number of Poles=8, Number of Positions=8, Number of Rows=2, Orientation="Right Angle", Packaging=Tray, Pitch=3mm, Pricing 1="1=1.91000, 10=1.73100, 100=1.48390, 500=1.23656, 1000=1.05990, 5000=0.93978, 10000=0.91858 (USD)", Radiation Hardening=No, REACH SVHC=Unknown, RoHS=Yes, Row Spacing=3mm, Stock 1=2632, Supplier 1=Digi-Key, Termination=Solder, Voltage Rating (DC)=250V, Working Voltage=250V
P2 P7: "CONN HEADER R/A 2POS", Case/Package=SMC, Color=Black, Contact Resistance=10mR, Current Rating=5A, Flammability Rating="UL94 V-0", Insulation Resistance=1GR, Manufacturer=Molex, Max Operating Temperature=105°C, Max Voltage Rating (DC)=250.25kV, Min Operating Temperature=-40°C, Package Quantity=3168, Supplier Part Number 1=WM1813-ND, Voltage Rating=600V, Voltage Rating (DC)=250V, Approvals=UL,CSA,TUV, ComponentLink1Description=https://datasheet.ciiva.com/14155/04402310-14155203.pdf?src-supplier=Distrelec, ComponentLink1URL=https://datasheet.ciiva.com/14155/04402310-14155203.pdf?src-supplier=Distrelec, ComponentLink2Description=https://datasheet.ciiva.com/19454/883270-19454006.pdf?src-supplier=Jameco, ComponentLink2URL=https://datasheet.ciiva.com/19454/883270-19454006.pdf?src-supplier=Jameco, ComponentLink3Description=https://datasheet.ciiva.com/5150/0430450200-pcb-headers-145770-5150407.pdf?src-supplier=Mouser, ComponentLink3URL=https://datasheet.ciiva.com/5150/0430450200-pcb-headers-145770-5150407.pdf?src-supplier=Mouser, ComponentLink4Description=https://datasheet.ciiva.com/11747/0900766b80027348-11747001.pdf?src-supplier=RSComponents, ComponentLink4URL=https://datasheet.ciiva.com/11747/0900766b80027348-11747001.pdf?src-supplier=RSComponents, ComponentLink5Description=https://datasheet.ciiva.com/16656/0430450200-pcb-headers-16656330.pdf?src-supplier=Avnet+Europe, ComponentLink5URL=https://datasheet.ciiva.com/16656/0430450200-pcb-headers-16656330.pdf?src-supplier=Avnet+Europe, ComponentLink6Description=https://datasheet.ciiva.com/10090/0430450200-pcb-headers-10090299.pdf?src-supplier=Avnet, ComponentLink6URL=https://datasheet.ciiva.com/10090/0430450200-pcb-headers-10090299.pdf?src-supplier=Avnet, ComponentLink7Description=https://datasheet.ciiva.com/36854/124280430450200-pcb-headers-36854331.pdf?src-supplier=Onlinecomponents.com, ComponentLink7URL=https://datasheet.ciiva.com/36854/124280430450200-pcb-headers-36854331.pdf?src-supplier=Onlinecomponents.com, ComponentLink8Description=https://datasheet.ciiva.com/1443/1859921-1443437.pdf?src-supplier=Element14, ComponentLink8URL=https://datasheet.ciiva.com/1443/1859921-1443437.pdf?src-supplier=Element14, Contact Gender=Male, Contact Material=Brass,Tin, Contact Plating=Tin, Diameter=3mm, Gender=Male, Glow Wire Compliant=Compliant, Halogen Free="Low Halogen", Housing Color=Black, Housing Material=Thermoplastic, Lead Free="Lead Free", Manufacturer Part Number=43045-0200, Material=Thermoplastic, Mount="Through Hole", Number of Circuits=2, Number of Contacts=2, Number of Positions=2, Number of Rows=2, Orientation="Right Angle", Packaging=Tray, Pitch=3mm, Pricing 1="1=0.97000, 10=0.84900, 100=0.73280, 500=0.59958, 1000=0.53296, 5000=0.46634, 10000=0.44302 (USD)", Radiation Hardening=No, REACH SVHC=Unknown, RoHS=Yes, Row Spacing=3mm, Stock 1=6320, Supplier 1=Digi-Key, Termination="Through Hole"
P8 P9: "Male connector dual row 90° 3 mm Pole no. 2x2 Micro-Fit, 43045-0400, Molex", Color=Black, Contact Resistance=10mR, Flammability Rating="UL94 V-0", Manufacturer=Molex, Max Operating Temperature=105°C, Max Voltage Rating (AC)=250V, Min Operating Temperature=-40°C, Supplier Part Number 1=WM1814-ND, ComponentLink1Description=https://datasheet.ciiva.com/712/430450200-sd-712017.pdf?src-supplier=Digi-Key, ComponentLink1URL=https://datasheet.ciiva.com/712/430450200-sd-712017.pdf?src-supplier=Digi-Key, ComponentLink2Description=https://datasheet.ciiva.com/20209/22-3744e-20209522.pdf?src-supplier=Rapid+Electronics, ComponentLink2URL=https://datasheet.ciiva.com/20209/22-3744e-20209522.pdf?src-supplier=Rapid+Electronics, ComponentLink3Description=https://datasheet.ciiva.com/11746/0900766b80027348-11746988.pdf?src-supplier=RSComponents, ComponentLink3URL=https://datasheet.ciiva.com/11746/0900766b80027348-11746988.pdf?src-supplier=RSComponents, ComponentLink4Description=https://datasheet.ciiva.com/30193/145420430450400-pcb-headers-30193310.pdf?src-supplier=Onlinecomponents.com, ComponentLink4URL=https://datasheet.ciiva.com/30193/145420430450400-pcb-headers-30193310.pdf?src-supplier=Onlinecomponents.com, Connector Type="Male Pin", Contact Material=Brass, Contact Plating=Tin, Depth=12.2mm, Fastening Type=Ramp, Housing Color=Black, Housing Material=Polymer, Length=10.15mm, Manufacturer Part Number=43045-0400, Mount="Through Hole", Number of Contacts=4, Number of Positions=4, Number of Rows=2, Orientation="Right Angle", Packaging=Tray, Pitch=3mm, Pricing 1="1=1.33000, 10=1.16700, 100=1.00670, 500=0.82368, 1000=0.73216, 5000=0.64064, 10000=0.60861 (USD)", RoHS=Yes, Row Spacing=0.118inch, Stock 1=5904, Supplier 1=Digi-Key, Termination=Solder
P10 P11: "Screw Terminal, 2-Pin"
R1 R3: library part ERJ-P06J103V, "RES SMD 10K OHM 5% 1/2W 0805", Digi-Key Part Number=P10KADCT-ND, Manufacturer="Panasonic Electronic Components", Operating Temperature="-55°C ~ 155°C", Package / Case="0805 (2012 Metric)", Power (Watts)="0.5W, 1/2W", Supplier Device Package=0805, Temperature Coefficient=±200ppm/°C, Tolerance=±5%, @ qty=1500, Composition="Thick Film", Datasheets=https://industrial.panasonic.com/cdbs/www-data/pdf/RDA0000/AOA0000C243.pdf, Factory Stock=0, Failure Rate=-, Features="Automotive AEC-Q200, Pulse Withstanding", Height - Seated (Max)="0.028\" (0.70mm)", Image=//media.digikey.com/Renders/Panasonic%20Renders/ERJ-0805%20Pkg.jpg, Minimum Quantity=1, Number of Terminations=2, Packaging="Cut Tape (CT)", Part Number=ERJ-P06J103V, Part Status=Active, Quantity Available=413576, Series=ERJ, Size / Dimension="0.079\" L x 0.049\" W (2.00mm x 1.25mm)", Unit Price (USD)=0.01839
R2 R4: library part ERJ-8ENF2611V, "RES SMD 2.61K OHM 1% 1/4W 1206", Digi-Key Part Number=P2.61KFCT-ND, Manufacturer="Panasonic Electronic Components", Operating Temperature="-55°C ~ 155°C", Package / Case="1206 (3216 Metric)", Power (Watts)="0.25W, 1/4W", Supplier Device Package=1206, Temperature Coefficient=±100ppm/°C, Tolerance=±1%, @ qty=1500, Composition="Thick Film", Datasheets=http://industrial.panasonic.com/www-cgi/jvcr13pz.cgi?E+PZ+3+AOA0002+ERJ8ENF2611V+7+WW, Factory Stock=0, Failure Rate=-, Features="Automotive AEC-Q200", Height - Seated (Max)="0.028\" (0.70mm)", Image=//media.digikey.com/Renders/Panasonic%20Renders/ERJ-1206%20Pkg.jpg, Minimum Quantity=1, Number of Terminations=2, Packaging="Cut Tape (CT)", Part Number=ERJ-8ENF2611V, Part Status=Active, Quantity Available=53359, Series=ERJ, Size / Dimension="0.126\" L x 0.063\" W (3.20mm x 1.60mm)", Unit Price (USD)=0.00933
R5 R6 R8 R9 R10 R12 R14 R15 R18: library part ERJ-6ENF1001V, "RES SMD 1K OHM 1% 1/8W 0805", Digi-Key Part Number=P1.00KCCT-ND, Manufacturer="Panasonic Electronic Components", Operating Temperature="-55°C ~ 155°C", Package / Case="0805 (2012 Metric)", Power (Watts)="0.125W, 1/8W", Supplier Device Package=0805, Temperature Coefficient=±100ppm/°C, Tolerance=±1%, @ qty=1500, Composition="Thick Film", Datasheets=http://industrial.panasonic.com/www-cgi/jvcr13pz.cgi?E+PZ+3+AOA0002+ERJ6ENF1001V+7+WW, Factory Stock=0, Failure Rate=-, Features="Automotive AEC-Q200", Height - Seated (Max)="0.028\" (0.70mm)", Image=//media.digikey.com/Renders/Panasonic%20Renders/ERJ-0805%20Pkg.jpg, Minimum Quantity=1, Number of Terminations=2, Packaging="Cut Tape (CT)", Part Number=ERJ-6ENF1001V, Part Status=Active, Quantity Available=12895103, Series=ERJ, Size / Dimension="0.079\" L x 0.049\" W (2.00mm x 1.25mm)", Unit Price (USD)=0.00729
R7: library part ERJ-6BQJ1R0V, "RES SMD 1 OHM 5% 1/3W 0805", Digi-Key Part Number=P17527CT-ND, Manufacturer="Panasonic Electronic Components", Operating Temperature="-55°C ~ 125°C", Package / Case="0805 (2012 Metric)", Power (Watts)="0.333W, 1/3W", Supplier Device Package=0805, Temperature Coefficient=±200ppm/°C, Tolerance=±5%, @ qty=1500, Composition="Thick Film", Datasheets=https://industrial.panasonic.com/cdbs/www-data/pdf/RDA0000/AOA0000C239.pdf, Factory Stock=0, Failure Rate=-, Features="Automotive AEC-Q200, Current Sense", Height - Seated (Max)="0.028\" (0.70mm)", Image=//media.digikey.com/Renders/Panasonic%20Renders/ERJ-0805%20Pkg.jpg, Minimum Quantity=1, Number of Terminations=2, Packaging="Cut Tape (CT)", Part Number=ERJ-6BQJ1R0V, Part Status=Active, Quantity Available=4990, Series=ERJ, Size / Dimension="0.079\" L x 0.049\" W (2.00mm x 1.25mm)", Unit Price (USD)=0.07603
R16 R17: "RES 1K OHM 5% 150W TO247-2", Manufacturer="Vishay Sfernice", Supplier Part Number 1=716-1214-ND, ComponentLink1Description=https://media.digikey.com/pdf/Data%20Sheets/Vishay%20Sfernice%20PDFs/LTO_150_Series.pdf?src-supplier=Digi-Key, ComponentLink1URL=https://media.digikey.com/pdf/Data%20Sheets/Vishay%20Sfernice%20PDFs/LTO_150_Series.pdf?src-supplier=Digi-Key, Digikey Link=https://www.digikey.com/products/en/resistors/through-hole-resistors/53?k=Power+Resistors&k=&pkeyword=Power+Resistors&sv=0&pv2=127&sf=0&FV=ffe00035%2Cmu1kOhms%7C2085%7C0%2Cmu1kOhms%7C2085%7C1&quantity=&ColumnSort=0&page=1&pageSize=25, Manufacturer Part Number=LTO150F10000JTE3, Pricing 1="1=12.19, 10=11.084, 100=7.8972, 1000=7.17808 (USD)", Stock 1=9, Supplier 1=Digi-Key
U1: "DC DC CONVERTER 13.8V 600W", Manufacturer=Vicor, Digikey Link=https://www.digikey.com/product-detail/en/vicor-corporation/DCM290P138T600A40/1102-5388-ND/4860626, Digikey P/N=1102-5388-ND, Manufacturer P/N=DCM290P138T600A40
K1: ComponentLink1Description=http://www.gigavac.com/sites/default/files/catalog/spec_sheet/gv200.pdf, ComponentLink1URL=http://www.gigavac.com/sites/default/files/catalog/spec_sheet/gv200.pdf

## Via types
v1: diameter 30, hole 15, Top Layer to Bottom Layer, 5 vias

## Nets (pads, with @x,y where several pads share a name; then routed paths per layer and width w, separated by ;. In a path a pad name is that pad's centre, name@x,y a point inside that pad or via, vN(x,y) a via of type N, cw(c..) or ccw(c..) an arc to the next point about the centre after c; other vN are vias at no path point)
Avionics_RET: D1.1 D2.1 D3.1 K3.8 K4.1 K5.8 LED1.2 LED2.2 LED9.2 LED10.2 P1.2 P8.3 P9.3 R2.2 R4.2 | length 14626.2
  Top Layer w10: 1152.24,4897.8 1149.72,4895.28 D1.1 1149.72,4825 1189.72,4785 K4.1 ; D3.1 1420.72,4899.72 1435,4914 1530,4914 1589,4855 LED10.2 ; v1(1770,4898) 1648,4898 1634.49,4884.49 LED10.2 ; K5.8 1920.83,4790 1670,4790 1634.49,4825.51 LED10.2 ; v1(4458,4888) 4458,3977 4535,3900 4829.72,3900 4940,3789.72 4940,3680 4912,3652 4837,3652 4767,3582 P9.3 ; R2.2 4555,3049.88 LED1.2 4549.49,2965 4515,2965 4505,2955 4505,2890 4570,2825 4725,2825 ; 4765,2825 4918.14,2825 5004.45,2911.31 5004.45,3036.34 4970.91,3069.88 R4.2 4965,3065 4955,3055 LED2.2 ; P8.3 4831.8,3700 4771.8,3640 4670,3640 4640,3670 4640,3725 4615,3750 4555,3750 4505,3700 4505,3565 4465,3525 4465,2855 4540,2780 4929.71,2780 5764.71,3615 6140,3615 ; P1.2 6304,4574 6331,4601 6559,4601 6705,4455 6705,4075 6704.8,4075 6579.8,3950 6360,3950 6300,3890 6300,3791.02 6228.98,3720 6150,3720 6140,3710 6140,3615 ; K3.8 7190,3775 7220.28,3744.72 D2.1 7220.28,3635.28 7200,3615 6140,3615
  Bottom Layer w10: v1(1770,4898) 1771.98,4899.98 4325.17,4899.98 4337.15,4888 v1(4458,4888) ; 4720,2890 4700,2890 4530,3060 4530,3730 4560,3760 4620,3760 4635,3745 4635,3645 P9.3 4764,3582 P8.3
  other v1: 4745,2845 4745,2905 4745,2960
High_Contactor_Aux: P1.4 R1.1 R2.1 | length 3391.5
  Top Layer w10: R1.1 4540,3178.74 4498.74,3178.74 4485,3165 4485,2880 4560,2805 4926.43,2805 6110,3988.57 6110,4114.49 6200.51,4205 6315,4205 6480,4370 6480,4465 6535,4520 P1.4
High_Contactor_DR: K3.4 P8.4 TP1.1 | length 1979.9
  Top Layer w10: TP1.1 4880,3582 P8.4
  Bottom Layer w10: P8.4 4932,3632 5028,3632 5110,3550 5225,3550 5305,3630 5320,3645 5885,3645 6205.75,3965.75 6205.75,4120.75 6210,4125 K3.4
HV_BATT_POS_IN: K5.6 P10.2
HV_BATT_POS_OUT: F1.1 HV_POS.1 K4.6 P10.1 R17.1 | length 1194.5
  Top Layer w10: K4.6 1555,3993.15 1555,4179.14 1616.86,4241 2437,4241
  Bottom Layer w10: K4.6@1503.7,3928.15 K4.6@1505.55,3928.15
HV_GND: C1.1 LED3.2 P11.1 P11.2 R8.1 R16.2 U1.4
HV_IND_GND: C2.2 C3.2 LED4.2 LED6.2 LED8.2 P2.1 P7.1 U1.6 U1.8 | length 3125.5
  Top Layer w10: 5085,4477 5085,4835 5120,4870 6615,4870 6715,4770 6715,4680 P2.1 P7.1
  Bottom Layer w10: P7.1 7210,4515 7215,4520 7593.86,4520 7613.86,4540 LED6.2@7625,4540
HV_IND_POS: I2.2 P2.2 P7.2 R9.1 R12.1 R14.1 TP5.1 | length 3109.2
  Top Layer w10: TP5.1 I2.2 5892.05,4802.05 5930,4840 6609.14,4840 6675,4774.14 6675,4602 P2.2 P7.2 7302,4402 7340,4440 7340,4855 7385,4900 7830,4900 7850,4880 R9.1
Low_Contactor_Aux: P1.3 R3.1 R4.1 | length 2280.9
  Top Layer w10: R3.1 5249.37,3179.37 6080,4010 6080,4115 6205,4240 6230,4240 6360,4370 6360,4435 6380,4455 6415,4455 6422,4462 P1.3
Low_Contactor_DR: P1.7 P9.4 TP2.1 | length 2179.7
  Top Layer w10: P9.4 4698,3703 4790,3795 TP2.1
  Bottom Layer w10: P9.4 4863,3865 5365,3865 5815,4315 6335,4315 6410,4390 6420,4390 6422,4392 P1.7
NetC1_2: C1.2 L1.2 R7.2 U1.0 | length 48
  Top Layer w10: U1.0@3328.05,4636 U1.0@3362.01,4669.96
NetC2_1: C2.1 C3.1 I2.1 U1.5 U1.7 | length 7.1
  Bottom Layer w10: U1.5@5187.99,4679.8 5194.8,4679.8 U1.5@5195,4680
NetF1_2: F1.2 L1.1 R7.1
NetF2_1: F2.1 K5.2 | length 1337.8
  Top Layer w10: F2.1 1242.8,3053.31 1410,3220.51 1410,3545 1475,3610 1589.14,3610 1595,3615.86 1595,4010 K5.2
NetF2_2: F2.2 K4.5 | length 461.1
  Top Layer w10: F2.2 1230,3635 1245,3650 1408.7,3650 K4.5
NetF3_1: F3.1 K5.7 | length 905.8
  Top Layer w10: K5.7 1995.28,4125 1880,4125 1845,4090 1845,3755 2010,3590 2010,3446.69 F3.1 ; F3.1@2043.39,3420 F3.1@2043.39,3432.8
NetF3_2: F3.2 R17.2
NetK3_7: K3.7 R15.1 | length 299.2
  Top Layer w10: R15.1 6444.72,3675 K3.7
NetK5_3: K5.3 R16.1
NetLED1_1: LED1.1 R5.2
NetLED2_1: LED2.1 R6.2 | length 140.4
  Top Layer w10: R6.2 4904.65,2870.12 4954.02,2919.49 LED2.1
NetLED3_1: LED3.1 R10.1 | length 177.4
  Top Layer w10: LED3.1 3425.51,3785 3465,3785 3480,3770 3480,3725 3494.37,3710.63 R10.1
NetLED4_1: LED4.1 R9.2 | length 147.6
  Top Layer w10: LED4.1 7760.51,4750 7793.87,4750 7805,4738.87 7805,4690 7814.37,4680.63 R9.2
NetLED6_1: LED6.1 R12.2 | length 965.8
  Top Layer w10: LED6.1@7625,4045.91 7725,4045.91 7825,4045.91 7925,4045.91 7975,4095.91 7975,4600 7950,4625 R12.2
NetLED8_1: LED8.1 R14.2
NetLED9_1: LED9.1 R15.2 | length 85.6
  Top Layer w10: LED9.1 R15.2
NetLED10_1: LED10.1 R18.2 | length 200.6
  Top Layer w10: LED10.1 R18.2 ; R18.2@1890.63,4870 R18.2@1894.49,4866.14
NetP8_1: P8.1 R1.2 R5.1 | length 1474.8
  Top Layer w10: R5.1 4672.72,2962.09 4672.72,3097.72 R1.2@4675,3100 ; R1.2 R1.2@4675,3100 ; P8.1 4932,3632 4861.29,3632 4830,3600.71 4830,3530 4805,3505 4655,3505 4630,3530 4630,3602.71 4600.71,3632 4559.29,3632 4530,3602.71 4530,3437.57 4710,3257.57 4710,3115 4695,3100 R1.2@4675,3100
NetP9_1: P9.1 R3.2 R6.1 | length 763.1
  Top Layer w10: P9.1 4580,3420 4730,3270 4730,3159.06 4788.43,3100.63 R3.2 4835,3095.63 R6.1
NetR8_2: R8.2 U1.1 | length 852.7
  Top Layer w10: U1.1@3362.01,4409.33 3400.34,4371 3593,4371 3627,4337 3627,3811.74 R8.2
NetR10_2: R10.2 U1.3 | length 561.2
  Top Layer w10: U1.3@3362.01,4192.4 3396.41,4158 3537,4158 3545,4150 R10.2
RMS_7_Relay2: D1.2 D2.2 K3.1 K4.8 P1.5 TP6.1 | length 7593.7
  Top Layer w10: D1.2 1325,4870 1484.45,4710.55 K4.8 ; TP6.1 P1.5 6136,4452 6136,4696 6219,4779 6491.86,4779 6544,4726.86 6544,4662.29 6876.29,4330 6985,4330 K3.1 7129.72,4064.72 D2.2
  Bottom Layer w10: K4.8 1642.45,4868 1827,4868 1838.98,4879.98 4316.89,4879.98 4338.86,4858 5730,4858 P1.5
RMS_21_Relay1: D3.2 K5.1 P1.6 R18.1 TP7.1 | length 5882.4
  Top Layer w10: D3.2@1510.28,4858 1510.28,4834.72 1634.45,4710.55 K5.1 1795.55,4620 2030,4620 2080,4670 2080,4825 TP7.1 2035,4870 R18.1@1969.37,4870
  Bottom Layer w10: K5.1 1854.43,4859.98 4308.6,4859.98 4330.58,4838 5617,4838 6105,4350 6252,4350 6297,4395 6300,4395 6304,4399 P1.6
VPOS-24V: K3.3 P1.1 P1.8 P8.2 P9.2 | length 3219.8
  Bottom Layer w10: P9.2 4582.71,3697.29 4582.71,3650 4640,3592.71 4640,3545 4660,3525 4943,3525 P8.2 5000,3580 5055,3525 5245,3525 5335,3615 5892.6,3615 K3.3 6540,4262.4 P1.8 6610,4472 6610,4564.14 6604.14,4570 6240,4570 6190,4520 P1.1
pads on no net: K1. K2. K3.2 K3.5 K3.6 K4.2 K4.3 K4.4 K4.7 K5.4 K5.5 MH1.2 MH2.2 MH3.2 MH4.2 P1.9 P2.3 P7.3 P8.5 P9.5 U1.2

## Polygon pours and split planes (outlines as drawn)
HV_GND on Top Layer "Top Layer-HV_GND" (solid, pour order 142): 2935,4140 3015,4140 3063,4092 3416,4092 3445,4063 3445,3969 3375,3899 3375,3755 3385,3745 3450,3745 3450,3700 3485,3665 3610,3665 3620,3675 3620,3730 3680,3730 3690,3720 3690,3385 4170,2905 4170,2295 4620,1845 5175,1845 5230,1790 5230,1490 5180,1440 4590,1440 4560,1470 4560,1600 2935,3225
Avionics_RET on Top Layer "Top Layer-Avionics_RET" (solid, pour order 136): 4715,2980 4730,2995 4760,2995 4775,2980 4775,2820 4715,2820
NetF3_2 on Top Layer "Top Layer-NetF3_2" (solid, pour order 134): 1475,3580 1736.02,3580 1730,3573.98 1730,2790 1535,2595 1175,2595 1140,2630 1140,2805 1180,2845 1410,2845 1475,2910
HV_BATT_POS_IN on Top Layer "Top Layer-HV_BATT_POS_IN" (solid, pour order 130): 1890.63,3975.63 1890.63,3864.37 1915,3840 2115,3840 2165,3790 2165,1990 1790,1615 1790,1445 1820,1415 2205,1415 2275,1485 2275,3950 2235,3990 1905,3990
HV_IND_GND on Top Layer "Top Layer-HV_IND_GND" (solid, pour order 120): 5990,4100 5990,3990 5917,3917 5108,3917 5035,3990 5035,4525 5046,4536 5236,4536 5255,4517 5255,4380 5214.9,4339.9 5090,4339.9 5090,4138 5128,4100
no net on Top Layer "Top Layer-No Net 4" (solid, pour order 124): 3395,3785
NetC2_1 on Top Layer "Top Layer-NetC2_1" (solid, pour order 118): 5990,4270 5990,4205 5922,4137 5145,4137 5115,4167 5115,4259 5146,4290 5253,4290 5290,4327 5290,4552 5274,4568 5149,4568 5102,4615 5102,4731.37 5140.63,4770 5430,4770 5470,4730 5470,4345 5525,4290 5970,4290
HV_IND_POS on Top Layer "Top Layer-HV_IND_POS" (solid, pour order 116): 7820,4775 7820,4740 7830,4730 8075,4730 8085,4740 8085,4775 8075,4785 7830,4785
HV_IND_GND on Top Layer "Top Layer-HV_IND_GND 1" (solid, pour order 114): 7965,3740 7965,3905 7930,3940 7650,3940 7565,4025 7565,4230 7780,4445 7955,4445 7955,4570 7945,4580 7855,4580 7790,4645 7790,4710.55 7730,4710.55 7690,4655 7665,4620 7515,4620 7475,4580 7475,3755 7540,3690 7915,3690
NetLED8_1 on Top Layer "Top Layer-NetLED8_1" (solid, pour order 112): 7540,3451.69 7540,3215 7570,3185 8070,3185 8090,3205 8090,4690 8075,4705 8015,4705 8000,4690 8000,3565 7925,3490 7578.31,3490
NetLED1_1 on Top Layer "Top Layer-NetLED1_1" (solid, pour order 108): 4530,2935 4530,2885 4570,2845 4698,2845 4698,2900 4693,2905 4605,2905 4590,2920 4590,2935
HV_BATT_POS_OUT on Top Layer "Top Layer-HV_BATT_POS_OUT" (solid, pour order 46): 1445,1501 1541,1405 1720,1405 1760,1445 1760,2020 1335,2445 1130,2445 1099,2414 1099,1847 1356,1590
no net on Top Layer "Top Layer-No Net 1" (solid, pour order 82): 5787.5,8452.5
no net on Top Layer "Top Layer-No Net 2" (solid, pour order 76): 3895,2265
no net on Top Layer "Top Layer-No Net 3" (solid, pour order 42): 1465,3255
no net on Top Layer "Top Layer-No Net" (solid, pour order 6): 4605,3015
no net on Bottom Layer "Bottom Layer-No Net" (solid, pour order 152): 6950,1485
no net on Bottom Layer "Bottom Layer-No Net 2" (solid, pour order 150): 10040,7085
no net on Bottom Layer "Bottom Layer-No Net 1" (solid, pour order 148): 4302.5,537.5
HV_BATT_POS_OUT on Bottom Layer "Bottom Layer-HV_BATT_POS_OUT" (solid, pour order 146): 1145,2310 1145,2215 1200,2160 1400,2160 1425,2185 1425,3760 1560,3895 1560,3955 1515,4000 1465,4000 1405,3940 1335,3870 1335,2445 1255,2365 1190,2365
NetK5_3 on Bottom Layer "Bottom Layer-NetK5_3" (solid, pour order 144): 4285,1615 4330,1570 4330,1475 4285,1430 3710,1430 1790,3350 1790,3805 1750,3845 1670,3845 1630,3885 1630,3970 1665,4005 1875,4005 1915,3965 1915,3685 3985,1615
Avionics_RET on Bottom Layer "Bottom Layer-Avionics_RET" (solid, pour order 138): 4730,2995 4760,2995 4775,2980 4775,2820 4715,2820 4715,2980
no net on Bottom Layer "Bottom Layer-No Net 2" (solid, pour order 72): 6120,1455
no net on Bottom Layer "Bottom Layer-No Net 3" (solid, pour order 64): 2515,1945
no net on Bottom Layer "Bottom Layer-No Net 4" (solid, pour order 62): 2625,1800
no net on Bottom Layer "Bottom Layer-No Net" (solid, pour order 30): 4700,3315
no net on Bottom Layer "Bottom Layer-No Net 1" (solid, pour order 24): 4637.5,3567.5
no net on Internal Plane 1 (split plane): 8094.9,1335.1 1090.1,1335.1 1090.1,4909.9 8094.9,4909.9
no net on Internal Plane 2 (split plane): 8094.9,1335.1 1090.1,1335.1 1090.1,4909.9 8094.9,4909.9

## Other copper
Top Layer:
  pour cut-out: 5827.5,8447.5
  pour cut-out: 5832.5,8447.5
  pour cut-out: 5832.5,8447.5
  pour cut-out: 5832.5,8447.5
Internal Plane 1 (plane layer: these items are gaps in the copper):
  text ".layer_name" at 1550,955 h60
Internal Plane 2 (plane layer: these items are gaps in the copper):
  text ".layer_name" at 1550,955 h60

## Silkscreen, mask and mechanical layers (free items; w line width, h text height)
Top Overlay:
  drawing of 25 lines, arcs and shapes, not listed
  text "Low Voltage" at 4120,4855 h60
  text "HIGH VOLTAGE" at 3610,4850 h60
  text "Precharge" at 2160,4355 h60 r270
  text "High Contactor Drive" at 6565,3665 h60
  text "BATT+" at 1355,2020 h60
  text "BATT-" at 7775,1955 h60
  text "S. Riggleman" at 7775,1435 h60
  text "RMS+" at 3875,1390 h60
  text "RMS-" at 5260,1380 h60
  text "W. Dvorak" at 7775,1365 h60
Board Outline:
  the board outline again, w10
Mechanical 16:
  drawing of 340 lines, arcs and shapes, not listed
  text "4" at 9667.5,8222.5 h70
  text "1" at 1586.34,8220 h70
  text "2" at 4082,8220 h70
  text "3" at 6797.5,8212.5 h70
  text "A" at 430,7622.5 h70
  text "A" at 11072.5,7622.5 h70
  text "Layer" at 6635.51,7020 h50
  text "Name" at 6980.44,7020 h50
  text "Material" at 7850.19,7020 h50
  text "Thickness" at 8570,7020 h50
  text "Constant" at 9114.86,7020 h50
  text "Board Layer Stack" at 9593.08,7020 h50
  text "1" at 6635.51,6920 h50
  text "Top Overlay" at 6980.44,6920 h50
  text "2" at 6635.51,6820 h50
  text "Top Solder" at 6980.44,6820 h50
  text "Solder Resist" at 7850.19,6820 h50
  text "0.40mil" at 8570,6820 h50
  text "3.5" at 9114.86,6820 h50
  text "3" at 6635.51,6720 h50
  text "Top Layer" at 6980.44,6720 h50
  text "Copper" at 7850.19,6720 h50
  text "1.40mil" at 8570,6720 h50
  text "4" at 6635.51,6620 h50
  text "Dielectric 1" at 6980.44,6620 h50
  text "FR-4" at 7850.19,6620 h50
  text "12.60mil" at 8570,6620 h50
  text "4.8" at 9114.86,6620 h50
  text "5" at 6635.51,6520 h50
  text "Internal Plane 1" at 6980.44,6520 h50
  text "Copper" at 7850.19,6520 h50
  text "1.40mil" at 8570,6520 h50
  text "6" at 6635.51,6420 h50
  text "Dielectric2" at 6980.44,6420 h50
  text "FR-4" at 7850.19,6420 h50
  text "12.60mil" at 8570,6420 h50
  text "4.8" at 9114.86,6420 h50
  text "7" at 6635.51,6320 h50
  text "Internal Plane 2" at 6980.44,6320 h50
  text "Copper" at 7850.19,6320 h50
  text "1.40mil" at 8570,6320 h50
  text "8" at 6635.51,6220 h50
  text "Dielectric3" at 6980.44,6220 h50
  text "FR-4" at 7850.19,6220 h50
  text "12.60mil" at 8570,6220 h50
  text "4.8" at 9114.86,6220 h50
  text "9" at 6635.51,6120 h50
  text "Bottom Layer" at 6980.44,6120 h50
  text "Copper" at 7850.19,6120 h50
  text "1.40mil" at 8570,6120 h50
  text "10" at 6635.51,6020 h50
  text "Bottom Solder" at 6980.44,6020 h50
  text "Solder Resist" at 7850.19,6020 h50
  text "0.40mil" at 8570,6020 h50
  text "3.5" at 9114.86,6020 h50
  text "11" at 6635.51,5920 h50
  text "Bottom Overlay" at 6980.44,5920 h50
  text "B" at 11070,5749.5 h70
  text "B" at 430,5697 h70
  text "C" at 11070,3374.5 h70
  text "C" at 430,3322 h70
  text "ENGINEER:" at 6535,1185 h45
  text "TITLE:" at 8065,1155 h45
  text "D" at 11070,1004.5 h70
  text "SRiggleman, WDvorak" at 6822.5,962.5 h110
  text "D" at 430,952 h70
  text ".PCB_FILE_NAME_NO_PATH" at 8140,912.28 h200
  text "PCB DESIGNER:" at 6545,865 h45
  text "SRiggleman, WDvorak" at 6655,745 h110
  text "DATE:" at 6545,560 h45
  text "PART NO.:" at 8045,560 h45
  text "REV:" at 10145,560 h45
  text "Badgerloop" at 5245,460 h110
  text ".PRINT_DATE" at 6595,440 h110
  text "Precharge HV Board" at 8115,435 h110
  text "A" at 10155,435 h110
  text "ERB Room 133" at 5245,360 h110
  text "1400 Engineering Drive" at 5245,260 h110
  text "FILE NAME:" at 6545,260 h45
  text "DWG NO:" at 8045,260 h45
  text "SCALE:" at 10145,260 h45
  text "Madison, WI 53706" at 5245,160 h110
  text ".PCB_FILE_NAME_NO_PATH" at 6595,140 h110
  text "1:1" at 10160,135 h110
  text "3" at 6571.34,-80 h70
  text "4" at 9078.01,-80 h70
Drill Drawing:
  drawing of 156 lines, arcs and shapes, not listed
  text "Symbol" at 852.19,7292.5 h54
  text "Count" at 1239.6,7292.5 h54
  text "Hole Size" at 1649.5,7292.5 h54
  text "Plated" at 2524.24,7292.5 h54
  text "Hole Type" at 2911.65,7292.5 h54
  text "Drill Layer Pair" at 3470,7292.5 h54
  text "Via/Pad" at 4599.66,7292.5 h54
  text "Pad Shape" at 5050.05,7292.5 h54
  text "Template" at 5617.4,7292.5 h54
  text "5" at 1239.6,7180 h45
  text "15.00mil (0.381mm)" at 1649.5,7180 h45
  text "PTH" at 2524.24,7180 h45
  text "Round" at 2911.65,7180 h45
  text "Top Layer - Bottom Layer" at 3470,7180 h45
  text "Via" at 4599.66,7180 h45
  text "Rounded" at 5050.05,7180 h45
  text "v76h38" at 5617.4,7180 h45
  text "16" at 1239.6,7067.5 h45
  text "27.56mil (0.700mm)" at 1649.5,7067.5 h45
  text "PTH" at 2524.24,7067.5 h45
  text "Round" at 2911.65,7067.5 h45
  text "Top Layer - Bottom Layer" at 3470,7067.5 h45
  text "Pad" at 4599.66,7067.5 h45
  text "Rounded" at 5050.05,7067.5 h45
  text "c130h70" at 5617.4,7067.5 h45
  text "20" at 1239.6,6955 h45
  text "40.00mil (1.016mm)" at 1649.5,6955 h45
  text "PTH" at 2524.24,6955 h45
  text "Round" at 2911.65,6955 h45
  text "Top Layer - Bottom Layer" at 3470,6955 h45
  text "Pad" at 4599.66,6955 h45
  text "Rounded" at 5050.05,6955 h45
  text "c178h102" at 5617.4,6955 h45
  text "24" at 1239.6,6842.5 h45
  text "51.18mil (1.300mm)" at 1649.5,6842.5 h45
  text "PTH" at 2524.24,6842.5 h45
  text "Round" at 2911.65,6842.5 h45
  text "Top Layer - Bottom Layer" at 3470,6842.5 h45
  text "Pad" at 4599.66,6842.5 h45
  text "Rounded" at 5050.05,6842.5 h45
  text "c230h130" at 5617.4,6842.5 h45
  text "4" at 1239.6,6730 h45
  text "59.06mil (1.500mm)" at 1649.5,6730 h45
  text "PTH" at 2524.24,6730 h45
  text "Round" at 2911.65,6730 h45
  text "Top Layer - Bottom Layer" at 3470,6730 h45
  text "Pad" at 4599.66,6730 h45
  text "Rounded" at 5050.05,6730 h45
  text "c300h150" at 5617.4,6730 h45
  text "3" at 1239.6,6617.5 h45
  text "59.84mil (1.520mm)" at 1649.5,6617.5 h45
  text "PTH" at 2524.24,6617.5 h45
  text "Round" at 2911.65,6617.5 h45
  text "Top Layer - Bottom Layer" at 3470,6617.5 h45
  text "Pad" at 4599.66,6617.5 h45
  text "Rounded" at 5050.05,6617.5 h45
  text "c230h152" at 5617.4,6617.5 h45
  text "6" at 1239.6,6505 h45
  text "79.92mil (2.030mm)" at 1649.5,6505 h45
  text "PTH" at 2524.24,6505 h45
  text "Round" at 2911.65,6505 h45
  text "Top Layer - Bottom Layer" at 3470,6505 h45
  text "Pad" at 4599.66,6505 h45
  text "Rounded" at 5050.05,6505 h45
  text "c300h203" at 5617.4,6505 h45
  text "4" at 1239.6,6392.5 h45
  text "98.43mil (2.500mm)" at 1649.5,6392.5 h45
  text "PTH" at 2524.24,6392.5 h45
  text "Round" at 2911.65,6392.5 h45
  text "Top Layer - Bottom Layer" at 3470,6392.5 h45
  text "Pad" at 4599.66,6392.5 h45
  text "Rounded" at 5050.05,6392.5 h45
  text "c320h250" at 5617.4,6392.5 h45
  text "4" at 1239.6,6280 h45
  text "116.00mil (2.946mm)" at 1649.5,6280 h45
  text "NPTH" at 2524.24,6280 h45
  text "Round" at 2911.65,6280 h45
  text "Top Layer - Bottom Layer" at 3470,6280 h45
  text "Pad" at 4599.66,6280 h45
  text "Rounded" at 5050.05,6280 h45
  text "c430hn295" at 5617.4,6280 h45
  text "6" at 1239.6,6167.5 h45
  text "118.00mil (2.997mm)" at 1649.5,6167.5 h45
  text "PTH" at 2524.24,6167.5 h45
  text "Round" at 2911.65,6167.5 h45
  text "Top Layer - Bottom Layer" at 3470,6167.5 h45
  text "Pad" at 4599.66,6167.5 h45
  text "Rounded" at 5050.05,6167.5 h45
  text "c376h300" at 5617.4,6167.5 h45
  text "4" at 1239.6,6055 h45
  text "275.59mil (7.000mm)" at 1649.5,6055 h45
  text "PTH" at 2524.24,6055 h45
  text "Round" at 2911.65,6055 h45
  text "Top Layer - Bottom Layer" at 3470,6055 h45
  text "Pad" at 4599.66,6055 h45
  text "Rounded" at 5050.05,6055 h45
  text "c800h700" at 5617.4,6055 h45
  text "96 Total" at 1239.6,5942.5 h45
Board Outline (Mech24):
  the board outline again, w10

## Dimensions
1070,4930 to 1070,1315 on Top Overlay
1062,5014 to 8107,5014 on Top Overlay

## Text inside footprints (layer, text, board x,y; h text height)
U1: Top Overlay "+IN" at 3498.99,4609.9 h60; Top Overlay "AD" at 3498.99,4349.27 h60; Top Overlay "DA" at 3498.99,4240.61 h60; Top Overlay "CL" at 3498.99,4132.34 h60; Top Overlay "-IN" at 3497.99,3975.96 h60; Top Overlay "-OUT" at 4931.99,3970.14 h60; Top Overlay "+OUT" at 4931.99,4186.67 h60; Top Overlay "-OUT" at 4931.99,4403.21 h60; Top Overlay "+OUT" at 4931.99,4619.74 h60